# EAGLE board tps61042 1 (EAGLE 6.5.0)
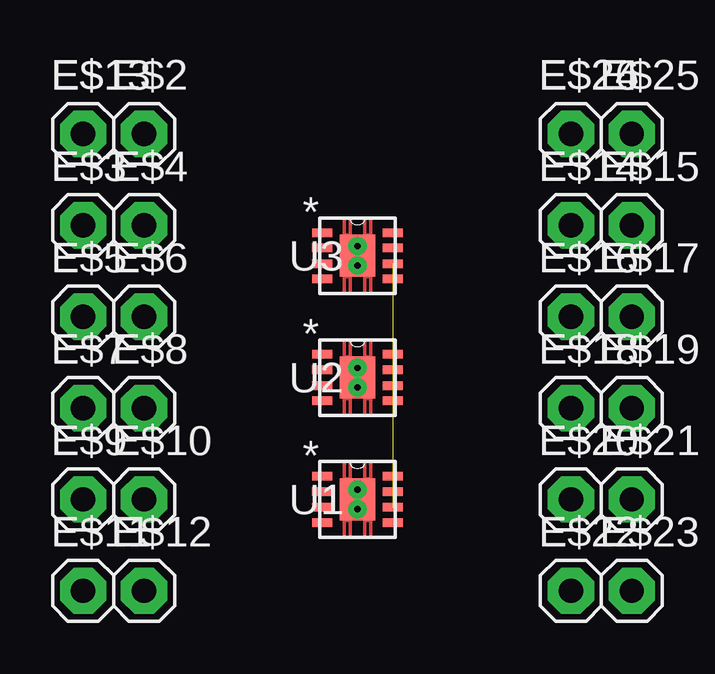
[diagram p0: board, top side]
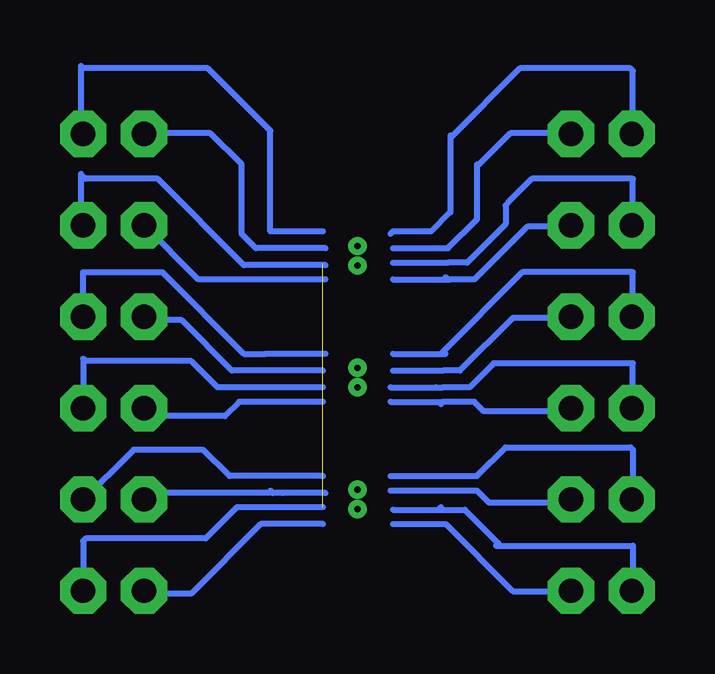
[diagram p1: board, bottom side, seen from below]

No outline drawn. Coordinates in mm, seen from the top.
Copper layers (1*16): Top 0.035mm / dielectric 1.5mm / Bottom 0.035mm
Design rules "default": minimum track width 10mil, minimum drill 24mil, track to track 8mil, track to pad 8mil, pad to pad 8mil, via to via 8mil, smd to smd 8mil, copper to edge 40mil, drill to drill 8mil, minimum pad ring 10mil, minimum via ring 8mil, stop-mask expansion 4mil, vias tented up to drill 0mil, thermal gap 10mil

## Footprints (pad centres in the part's own frame; a part is rotated, then mirrored left to right if it is on the bottom)
1X01 = drill 1.016 pad 1.93 octagon: 1 0,0
DRB8_1P75X1P5 = smd 0.838 x 0.356: 1 -1.473,0.965; 2 -1.473,0.33; 3 -1.473,-0.33; 4 -1.473,-0.965; 5 1.473,-0.965; 6 1.473,-0.33; 7 1.473,0.33; 8 1.473,0.965 | smd 1.499 x 1.753: 9 0,0 | drill 0.254: V 0,-0.406; V_2 0,0.406

## Placement (x,y rotation side)
E$1  [1X01]  15.24,77.47 0 top
E$2  [1X01]  17.78,77.47 0 top
E$3  [1X01]  15.24,73.66 0 top
E$4  [1X01]  17.78,73.66 0 top
E$5  [1X01]  15.24,69.85 0 top
E$6  [1X01]  17.78,69.85 0 top
E$7  [1X01]  15.24,66.04 0 top
E$8  [1X01]  17.78,66.04 0 top
E$9  [1X01]  15.24,62.23 0 top
E$10  [1X01]  17.78,62.23 0 top
E$11  [1X01]  15.24,58.42 0 top
E$12  [1X01]  17.78,58.42 0 top
E$13  [1X01]  15.24,77.47 0 top
E$14  [1X01]  35.56,73.66 0 top
E$15  [1X01]  38.1,73.66 0 top
E$16  [1X01]  35.56,69.85 0 top
E$17  [1X01]  38.1,69.85 0 top
E$18  [1X01]  35.56,66.04 0 top
E$19  [1X01]  38.1,66.04 0 top
E$20  [1X01]  35.56,62.23 0 top
E$21  [1X01]  38.1,62.23 0 top
E$22  [1X01]  35.56,58.42 0 top
E$23  [1X01]  38.1,58.42 0 top
E$24  [1X01]  35.56,77.47 0 top
E$25  [1X01]  38.1,77.47 0 top
E$26  [1X01]  35.56,77.47 0 top
U1  TPS61042_DRB_8  [DRB8_1P75X1P5]  26.67,62.23 0 top
U2  TPS61042_DRB_8  [DRB8_1P75X1P5]  26.67,67.31 0 top
U3  TPS61042_DRB_8  [DRB8_1P75X1P5]  26.67,72.39 0 top

## Library data of the parts
E$1-E$26 = adafruit
U1-U3 = tps61042; DATASHEETURL: http://www.ti.com/lit/gpn/TPS61042; DESCRIPTION: 30-V, 500-mA Switch Boost Converter in QFN-8 for White LED Applications; FAMILY_NAME: WHITE LED DRIVER; GENERIC_PART_NUMBER: TPS61042; INDUSTRY_STD_PKG_TYPE: SON; MANUFACTURER: Texas Instruments; MANUFACTURER_PART_NUMBER: tps61042_drb_8; PACKAGE_DESIGNATOR: DRB; PIN_COUNT: 8; VENDOR: Texas Instruments

## Nets
GND: U1.6 U2.6 U3.6

## Tracks (layer width: path | path; a pad name or v marks a point on that pad's centre or on a via)
GND  (2 unrouted)
S$1
  Bottom 0.254: 15.2,77.4 15.2,80.1 15.3,80.2 19.9,80.2 22.8,77.3 | 22.8,77.4 22.8,77.3 | 22.8,77.3 22.8,74.2 23.6,73.4 25.2,73.4 25.3,73.3
S$2
  Bottom 0.254: 17.8,65.9 21.4,65.9 21.8,66.3 23.1,66.3 23.2,66.2
S$3
  Bottom 0.254: 17.8,77.5 20.3,77.5 21.6,76.2
S$4
  Bottom 0.254: 25.2,72.7 22.9,72.7 21.7,73.9 21.7,76.2
S$5
  Bottom 0.254: 25.2,71.4 22.8,71.4
S$6
  Bottom 0.254: 28.1,73.4 30.3,73.4 30.3,77.6 32.9,80.2 38.1,80.2 38.2,80.3 38.2,77.4 38.3,77.3
S$7
  Bottom 0.254: 28,72.7 30.9,72.7 31.5,73.3 31.5,76.2 32.8,77.5 35.7,77.5
S$8
  Bottom 0.254: 28,72 31.4,72 35,75.6 38,75.6 38.2,75.8 38.2,73.6 38.3,73.5
S$9
  Bottom 0.254: 28,71.4 30.3,71.4 30.5,71.4 33.3,71.4 35.6,73.7
S$10
  Bottom 0.254: 35.7,66.2 35.7,65.7
S$11
  Bottom 0.254: 20.9,60.3 15.2,60.3 15.2,58.3
S$13
  Bottom 0.254: 25.3,66.3 23.1,66.3
S$15
  Bottom 0.254: 28.1,67.6 31.9,67.6 34,69.7 35.6,69.7
S$16
  Bottom 0.254: 28.1,66.9 32.5,66.9 33.6,68 38,68 38.1,68.1 38.1,66 38.3,65.8
S$17
  Bottom 0.254: 28.1,66.3 31.6,66.3 32.2,65.7 35.6,65.7 35.7,65.8
S$18
  Bottom 0.254: 25.3,63.2 21.7,63.2 20.5,64.4 15.3,64.4 15.2,64.3 15.2,62.2 15.3,62.1
S$19
  Bottom 0.254: 25.3,62.6 21.7,62.6 21.2,62.1 17.8,62.1
S$20
  Bottom 0.254: 25.2,61.8 23.3,61.8 | 23.3,61.8 23.2,61.9 | 23.3,61.8 22.2,61.8 20.8,60.4
S$21
  Bottom 0.254: 25.2,61.2 23,61.2 20.2,58.4 17.7,58.4
S$22
  Bottom 0.254: 28.1,63.2 32,63.2 33.1,64.3 36,64.3 38.2,62.1
S$23
  Bottom 0.254: 28,62.5 29.8,62.5 30.2,62.5 | 30.2,62.5 30.3,62.6 | 30.2,62.5 35.3,62.5 35.7,62.1
S$24
  Bottom 0.254: 28.1,61.9 31.7,61.9 33,60.6 38,60.6 38.1,60.5 38.1,58.4 38.3,58.2
S$25
  Bottom 0.254: 28.1,61.2 30.7,61.2 33.6,58.3 35.7,58.3 35.8,58.4
S$26
  Bottom 0.254: 15.2,73.6 15.2,75.6 19.4,75.6 20.4,74.6
S$27
  Bottom 0.254: 17.9,73.6 19.6,73.6 21.8,71.4 22.9,71.4 23,71.5
S$28
  Bottom 0.254: 15.2,69.8 15.2,71.7 19.8,71.7 23.2,68.3 | 25.2,68.3 23.2,68.3 | 23.2,68.3 23,68.3
S$29
  Bottom 0.254: 20.5,74.5 20.5,73.7 22.1,72.1 22.9,72.1 23,72.1 25.2,72.1
S$30
  Bottom 0.254: 38.1,69.9 38.1,71.7 34.8,71.7 31.4,68.3 30.5,68.3 30,68.3 28,68.3
S$31
  Bottom 0.254: 17.8,69.8 20.2,69.8 22.4,67.6 23.1,67.6 23.4,67.6 25.2,67.6
S$32
  Bottom 0.254: 15.2,66 15.2,67.9 21,67.9 22,66.9 23.1,66.9 23.4,66.9 25.3,66.9